# EAGLE board homeboard29 (EAGLE 6.0), part 1 of 2
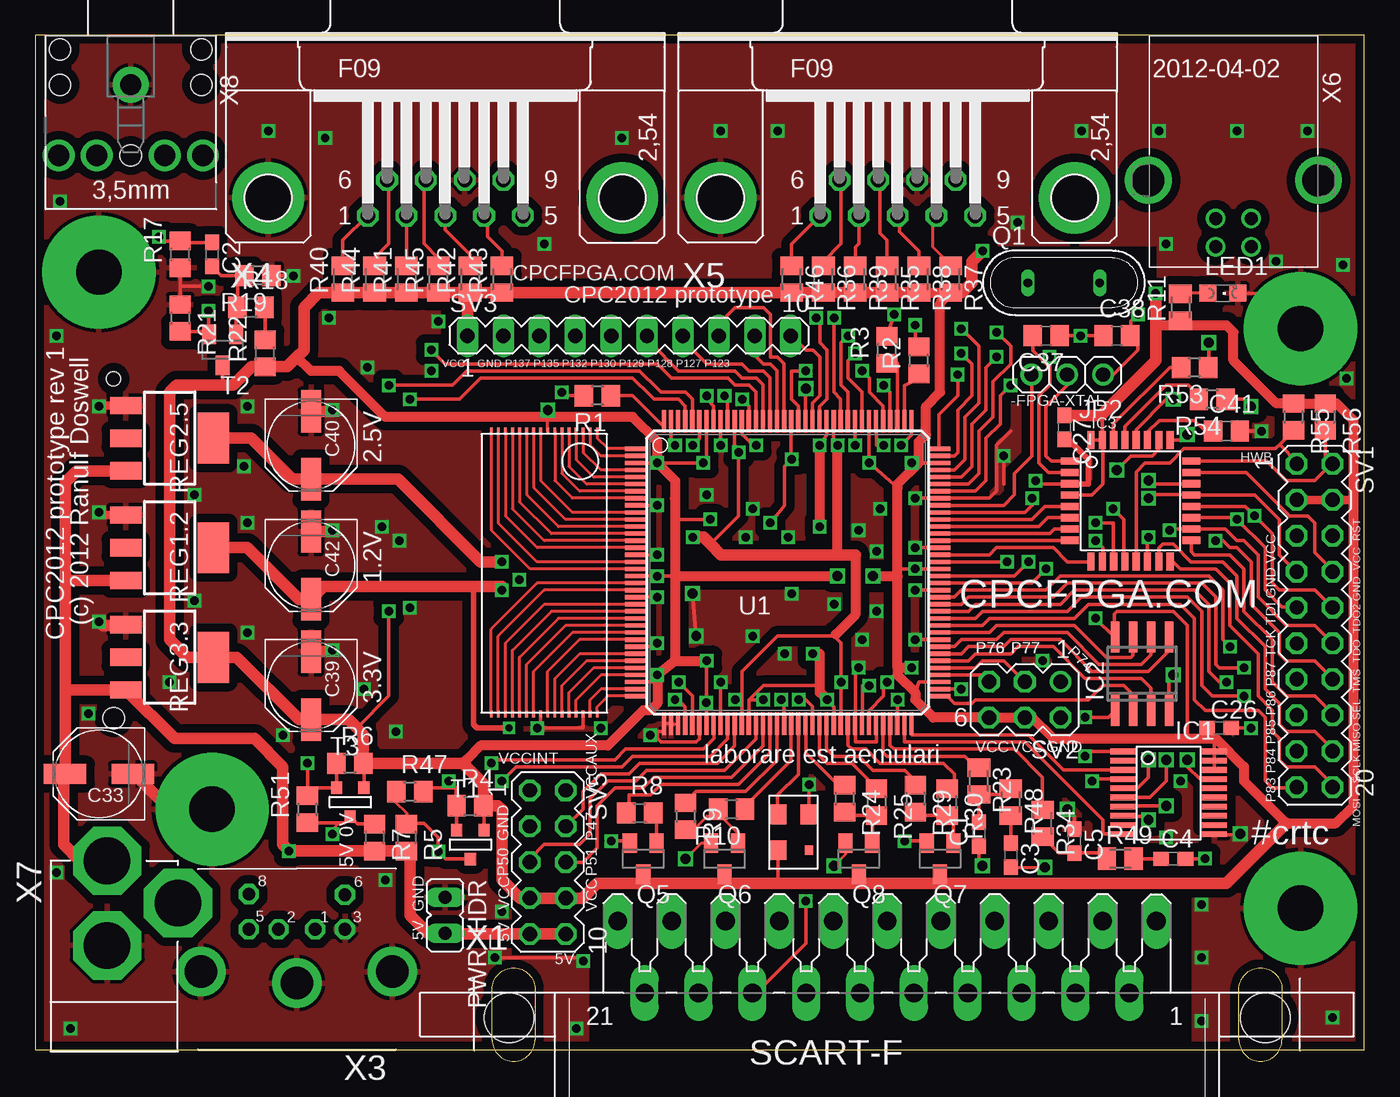
[diagram p0: board, top side]
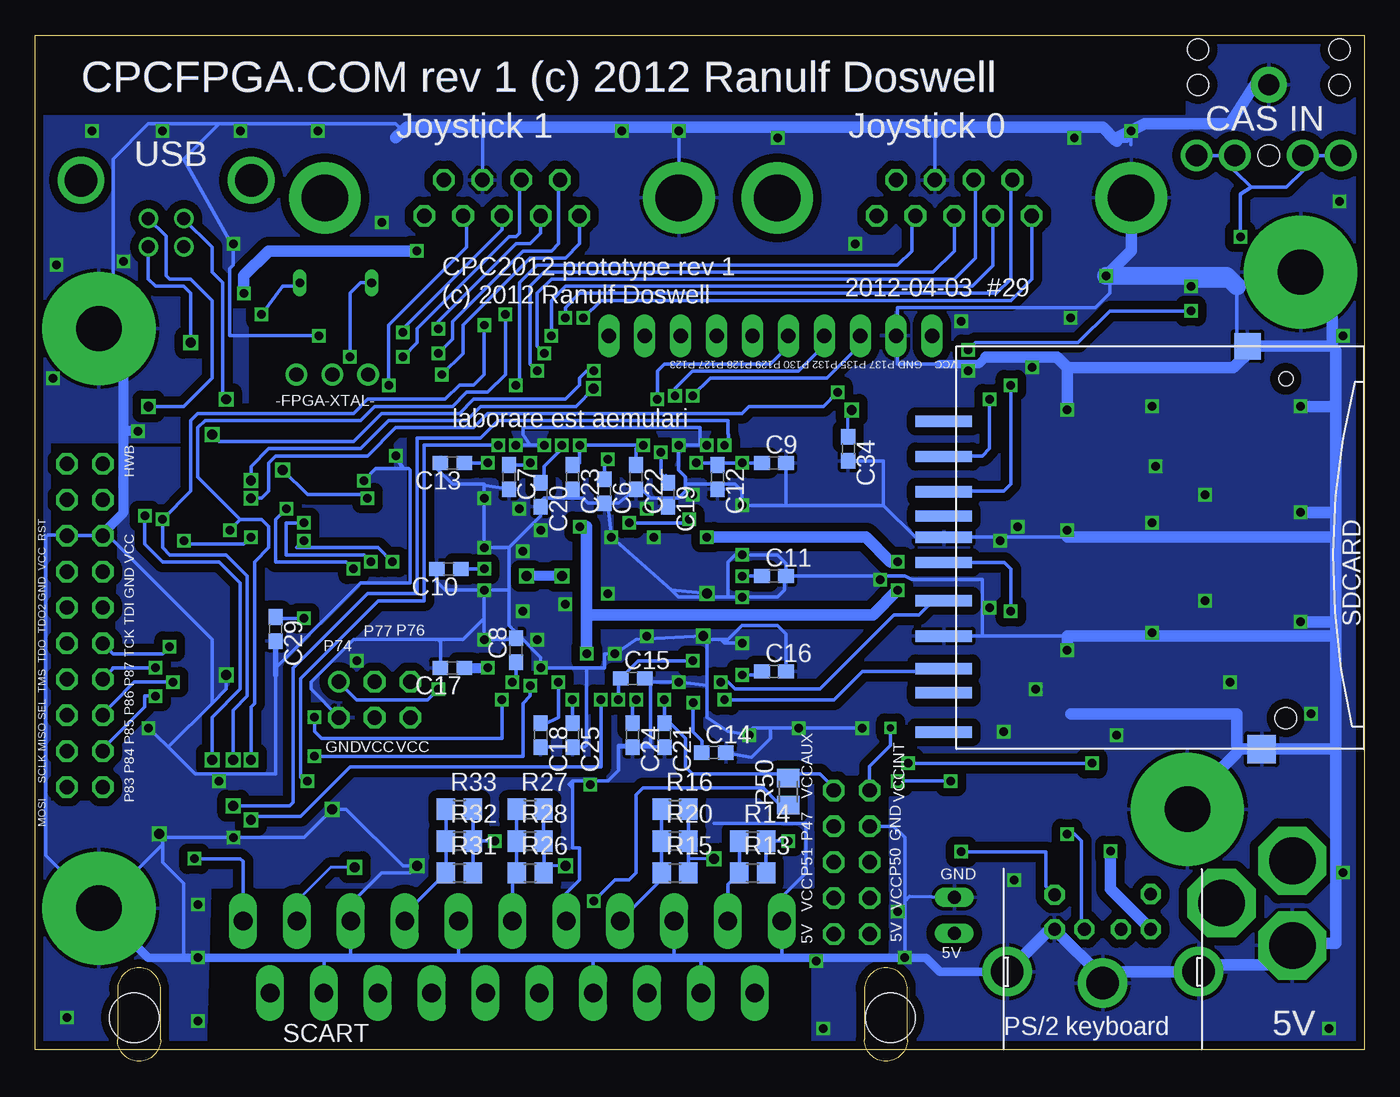
[diagram p1: board, bottom side, seen from below]

Size 94 x 72.58 mm. Coordinates in mm from the lower left corner, seen from the top.
Outline: 0,0.83 94,0.83 94,72.58 0,72.58 0,0.83
Copper layers (1*16): Top 0.0356mm / dielectric 1.5011mm / Bottom 0.0356mm
Design rules: minimum track width 7mil, minimum drill 15mil, track to track 7mil, track to pad 7mil, pad to pad 7mil, via to via 7mil, smd to smd 7mil, copper to edge 15mil, drill to drill 15mil, minimum pad ring 7mil, minimum via ring 7mil, stop-mask expansion 4mil, vias tented up to drill 0mil, thermal gap 10mil
Net classes: 1 power: width 0.6 mm, drill 1.1 mm, clearance 0.4 mm; 2 gnd: width 0.305 mm, drill 0.508 mm, clearance 0.152 mm

## Footprints (pad centres in the part's own frame; a part is rotated, then mirrored left to right if it is on the bottom)
C0603 = smd 1.1 x 1: 1 -0.85,0; 2 0.85,0
PANASONIC_D = smd 3 x 1.4: + 2.4,0; - -2.4,0
C0805 = smd 1.3 x 1.5: 1 -0.95,0; 2 0.95,0
VO20 = smd 0.4 x 1.8: 1 5.85,6.15; 2 5.2,6.15; 3 4.55,6.15; 4 3.9,6.15; 5 3.25,6.15; 6 2.6,6.15; 7 1.95,6.15; 8 1.3,6.15; 9 0.65,6.15; 10 0,6.15; 11 0,-0.3; 12 0.65,-0.3; 13 1.3,-0.3; 14 1.95,-0.3; 15 2.6,-0.3; 16 3.25,-0.3; 17 3.9,-0.3; 18 4.55,-0.3; 19 5.2,-0.3; 20 5.85,-0.3
SO-08 = smd 0.6 x 2.2: 1 -1.905,-2.6; 2 -0.635,-2.6; 3 0.635,-2.6; 4 1.905,-2.6; 5 1.905,2.6; 6 0.635,2.6; 7 -0.635,2.6; 8 -1.905,2.6
TQFP32-08 = smd 1.27 x 0.508: 1 -4.293,2.8; 2 -4.293,2; 3 -4.293,1.2; 4 -4.293,0.4; 5 -4.293,-0.4; 6 -4.293,-1.2; 7 -4.293,-2; 8 -4.293,-2.8; 17 4.293,-2.8; 18 4.293,-2; 19 4.293,-1.2; 20 4.293,-0.4; 21 4.293,0.4; 22 4.293,1.2; 23 4.293,2; 24 4.293,2.8 | smd 0.508 x 1.27: 9 -2.8,-4.293; 10 -2,-4.293; 11 -1.2,-4.293; 12 -0.4,-4.293; 13 0.4,-4.293; 14 1.2,-4.293; 15 2,-4.293; 16 2.8,-4.293; 25 2.8,4.293; 26 2,4.293; 27 1.2,4.293; 28 0.4,4.293; 29 -0.4,4.293; 30 -1.2,4.293; 31 -2,4.293; 32 -2.8,4.293
1X03 = drill 1.016: 1 -2.54,0; 2 0,0; 3 2.54,0
CHIPLED_0805 = smd 1.2 x 1.2: A 0,-1.05; C 0,1.05
JP1 = drill 0.914 long: 1 0,-1.27; 2 0,1.27
QS = drill 0.61 long: 1 -2.54,0; 2 2.54,0
SOT23 = smd 1 x 1.4: 1 -0.95,-1.1; 2 0.95,-1.1; 3 0,1.1
R0805 = smd 1.3 x 1.5: 1 -0.95,0; 2 0.95,0
M0805 = smd 1.3 x 1.6: 1 -0.95,0; 2 0.95,0
SOT223 = smd 1.219 x 2.235: 1 -2.311,-3.099; 2 0,-3.099; 3 2.311,-3.099 | smd 3.6 x 2.2: 4 0,3.099
MA10-2 = drill 1.016 octagon: 1 -11.43,-1.27; 2 -11.43,1.27; 3 -8.89,-1.27; 4 -8.89,1.27; 5 -6.35,-1.27; 6 -6.35,1.27; 7 -3.81,-1.27; 8 -3.81,1.27; 9 -1.27,-1.27; 10 -1.27,1.27; 11 1.27,-1.27; 12 1.27,1.27; 13 3.81,-1.27; 14 3.81,1.27; 15 6.35,-1.27; 16 6.35,1.27; 17 8.89,-1.27; 18 8.89,1.27; 19 11.43,-1.27; 20 11.43,1.27
MA03-2 = drill 1.016: 1 -2.54,-1.27 | drill 1.016 octagon: 2 -2.54,1.27; 3 0,-1.27; 4 0,1.27; 5 2.54,-1.27; 6 2.54,1.27
MA10-1 = drill 1.016 long: 1 -11.43,0; 2 -8.89,0; 3 -6.35,0; 4 -3.81,0; 5 -1.27,0; 6 1.27,0; 7 3.81,0; 8 6.35,0; 9 8.89,0; 10 11.43,0
MA05-2 = drill 1.016 octagon: 1 -5.08,-1.27; 2 -5.08,1.27; 3 -2.54,-1.27; 4 -2.54,1.27; 5 0,-1.27; 6 0,1.27; 7 2.54,-1.27; 8 2.54,1.27; 9 5.08,-1.27; 10 5.08,1.27
SOT-23 = smd 0.787 x 0.889: 1 0.025,-1.016; 2 -0.94,1.016; 3 0.991,1.016
TQ144 = smd 1.6 x 0.3: P1 -10.7,8.75; P2 -10.7,8.25; P3 -10.7,7.75; P4 -10.7,7.25; P5 -10.7,6.75; P6 -10.7,6.25; P7 -10.7,5.75; P8 -10.7,5.25; P9 -10.7,4.75; P10 -10.7,4.25; P11 -10.7,3.75; P12 -10.7,3.25; P13 -10.7,2.75; P14 -10.7,2.25; P15 -10.7,1.75; P16 -10.7,1.25; P17 -10.7,0.75; P18 -10.7,0.25; P19 -10.7,-0.25; P20 -10.7,-0.75; P21 -10.7,-1.25; P22 -10.7,-1.75; P23 -10.7,-2.25; P24 -10.7,-2.75; P25 -10.7,-3.25; P26 -10.7,-3.75; P27 -10.7,-4.25; P28 -10.7,-4.75; P29 -10.7,-5.25; P30 -10.7,-5.75; P31 -10.7,-6.25; P32 -10.7,-6.75; P33 -10.7,-7.25; P34 -10.7,-7.75; P35 -10.7,-8.25; P36 -10.7,-8.75; P73 10.7,-8.75; P74 10.7,-8.25; P75 10.7,-7.75; P76 10.7,-7.25; P77 10.7,-6.75; P78 10.7,-6.25; P79 10.7,-5.75; P80 10.7,-5.25; P81 10.7,-4.75; P82 10.7,-4.25; P83 10.7,-3.75; P84 10.7,-3.25; P85 10.7,-2.75; P86 10.7,-2.25; P87 10.7,-1.75; P88 10.7,-1.25; P89 10.7,-0.75; P90 10.7,-0.25; P91 10.7,0.25; P92 10.7,0.75; P93 10.7,1.25; P94 10.7,1.75; P95 10.7,2.25; P96 10.7,2.75; P97 10.7,3.25; P98 10.7,3.75; P99 10.7,4.25; P100 10.7,4.75; P101 10.7,5.25; P102 10.7,5.75; P103 10.7,6.25; P104 10.7,6.75; P105 10.7,7.25; P106 10.7,7.75; P107 10.7,8.25; P108 10.7,8.75 | smd 0.3 x 1.6: P37 -8.75,-10.7; P38 -8.25,-10.7; P39 -7.75,-10.7; P40 -7.25,-10.7; P41 -6.75,-10.7; P42 -6.25,-10.7; P43 -5.75,-10.7; P44 -5.25,-10.7; P45 -4.75,-10.7; P46 -4.25,-10.7; P47 -3.75,-10.7; P48 -3.25,-10.7; P49 -2.75,-10.7; P50 -2.25,-10.7; P51 -1.75,-10.7; P52 -1.25,-10.7; P53 -0.75,-10.7; P54 -0.25,-10.7; P55 0.25,-10.7; P56 0.75,-10.7; P57 1.25,-10.7; P58 1.75,-10.7; P59 2.25,-10.7; P60 2.75,-10.7; P61 3.25,-10.7; P62 3.75,-10.7; P63 4.25,-10.7; P64 4.75,-10.7; P65 5.25,-10.7; P66 5.75,-10.7; P67 6.25,-10.7; P68 6.75,-10.7; P69 7.25,-10.7; P70 7.75,-10.7; P71 8.25,-10.7; P72 8.75,-10.7; P109 8.75,10.7; P110 8.25,10.7; P111 7.75,10.7; P112 7.25,10.7; P113 6.75,10.7; P114 6.25,10.7; P115 5.75,10.7; P116 5.25,10.7; P117 4.75,10.7; P118 4.25,10.7; P119 3.75,10.7; P120 3.25,10.7; P121 2.75,10.7; P122 2.25,10.7; P123 1.75,10.7; P124 1.25,10.7; P125 0.75,10.7; P126 0.25,10.7; P127 -0.25,10.7; P128 -0.75,10.7; P129 -1.25,10.7; P130 -1.75,10.7; P131 -2.25,10.7; P132 -2.75,10.7; P133 -3.25,10.7; P134 -3.75,10.7; P135 -4.25,10.7; P136 -4.75,10.7; P137 -5.25,10.7; P138 -5.75,10.7; P139 -6.25,10.7; P140 -6.75,10.7; P141 -7.25,10.7; P142 -7.75,10.7; P143 -8.25,10.7; P144 -8.75,10.7
GNDHOLE = drill 3.2 pad 8: GND 0,0
OSC_7C = smd 0.7 x 0.6: ENA -1.27,-1.1 | smd 1.4 x 1.2: GND 1.27,-1.1; OUT 1.27,1.1; VDD -1.27,1.1
SDCARD-NOHOLE = smd 0.8 x 4 bottom: 1 7.8,0.99; 2 10.3,0.99; 3 13.5,0.99; 4 15.3,0.99; 5 18,0.99; 6 20.5,0.99; 7 22.8,0.99; 8 24.5,0.99; 9 5.3,0.99; CD 12,0.99; WP 27.3,0.99 | smd 2.032 x 2.032 bottom: MT1 28.5,-21.5 | smd 1.9 x 1.9 bottom: MT3 0,-20.5 | hole 1.5: 26.3,-23.21 | hole 1: 2.3,-23.21
TSOP32 = smd 0.5 x 0.2: P1 -9.75,3.75; P2 -9.75,3.25; P3 -9.75,2.75; P4 -9.75,2.25; P5 -9.75,1.75; P6 -9.75,1.25; P7 -9.75,0.75; P8 -9.75,0.25; P9 -9.75,-0.25; P10 -9.75,-0.75; P11 -9.75,-1.25; P12 -9.75,-1.75; P13 -9.75,-2.25; P14 -9.75,-2.75; P15 -9.75,-3.25; P16 -9.75,-3.75; P17 10.25,-3.75; P18 10.25,-3.25; P19 10.25,-2.75; P20 10.25,-2.25; P21 10.25,-1.75; P22 10.25,-1.25; P23 10.25,-0.75; P24 10.25,-0.25; P25 10.25,0.25; P26 10.25,0.75; P27 10.25,1.25; P28 10.25,1.75; P29 10.25,2.25; P30 10.25,2.75; P31 10.25,3.25; P32 10.25,3.75
SCART-CLIP = drill 1.321 long: 1 19.05,5.08; 2 17.145,0; 3 15.24,5.08; 4 13.335,0; 5 11.43,5.08; 6 9.525,0; 7 7.62,5.08; 8 5.715,0; 9 3.81,5.08; 10 1.905,0; 11 0,5.08; 12 -1.905,0; 13 -3.81,5.08; 14 -5.715,0; 15 -7.62,5.08; 16 -9.525,0; 17 -11.43,5.08; 18 -13.335,0; 19 -15.24,5.08; 20 -17.145,0; 21 -19.05,5.08 | hole 3.5: 26.75,-1.75; -26.75,-1.75
M_DIN6 = drill 0.9 pad 1.422 octagon: 1 -1.3,-3.75; 2 1.3,-3.75; 3 -3.4,-3.75; 5 3.4,-3.75; 6 -3.4,-6.2; 8 3.4,-6.25 | drill 2.3 pad 3.5: SH1 6.8,-0.75; SH2 0,0.05; SH3 -6.75,-0.75
F09HP = drill 1.016 octagon: 1 -5.486,-1.27; 2 -2.743,-1.27; 3 0,-1.27; 4 2.743,-1.27; 5 5.486,-1.27; 6 -4.115,1.27; 7 -1.372,1.27; 8 1.372,1.27; 9 4.115,1.27 | drill 3.302 pad 5.08: G1 -12.522,0; G2 12.522,0
85-32004-10X = drill 0.92 pad 1.27: 1 4.71,-1.25; 2 4.71,1.25; 3 2.71,1.25; 4 2.71,-1.25 | drill 2.3 pad 3: M1 0,6.02; M2 0,-6.02
DC-21MM = drill 3.302 pad 4.826 octagon: 1 -5.08,-3.353; 2 -0.076,-6.35; 3 -0.076,-0.356
20-0137 = drill 1.5 pad 2.54: 1 -5,0 | drill 1.5: 2 0,5.1; 3 0,2.4; 4 0,-2.4; 5 0,-5.1 | hole 1.5: -5,5; -5,-5; 0,0; -7.5,5; -7.5,-5

## Placement (x,y rotation side)
C1  [C0603]  66.75,16.08 90 top
C2  100nF  [C0603]  12.5,57.08 270 top
C3  [C0603]  69,14.58 270 top
C4  [C0603]  80.5,14.33 0 top
C5  [C0603]  73.5,15.58 270 top
C6  100nF  [C0603]  53.75,40.33 270 bottom
C7  100nF  [C0603]  60.5,41.33 270 bottom
C8  100nF  [C0603]  60,29.08 90 bottom
C9  100nF  [C0603]  41.75,42.33 0 bottom
C10  100nF  [C0603]  64.75,34.83 180 bottom
C11  100nF  [C0603]  41.75,34.33 0 bottom
C12  100nF  [C0603]  45.75,41.33 270 bottom
C13  100nF  [C0603]  64.5,42.33 180 bottom
C14  100nF  [C0603]  46,21.83 0 bottom
C15  100nF  [C0603]  51.75,27.08 0 bottom
C16  100nF  [C0603]  41.75,27.58 0 bottom
C17  100nF  [C0603]  64.5,27.83 180 bottom
C18  100nF  [C0603]  58.25,23.08 270 bottom
C19  100nF  [C0603]  49.25,40.08 270 bottom
C20  100nF  [C0603]  58.25,40.08 270 bottom
C21  100nF  [C0603]  49.5,23.08 270 bottom
C22  100nF  [C0603]  51.5,41.33 270 bottom
C23  100nF  [C0603]  56,41.33 270 bottom
C24  100nF  [C0603]  51.75,23.08 270 bottom
C25  100nF  [C0603]  56,23.08 270 bottom
C26  100nF  [C0603]  83.75,23.58 0 top
C27  100nF  [C0603]  72.8,44.84 270 top
C29  100nF  [C0603]  77,30.58 270 bottom
C33  100u  [PANASONIC_D]  4.5,20.33 180 top
C34  100nF  [C0603]  36.5,43.33 270 bottom
C37  [C0805]  71.5,51.33 180 top
C38  [C0805]  76.5,51.33 0 top
C39  100u  [PANASONIC_D]  19.5,26.58 270 top
C40  100u  [PANASONIC_D]  19.5,43.58 270 top
C41  1uF  [C0805]  84.25,44.58 0 top
C42  100u  [PANASONIC_D]  19.5,35.08 270 top
IC1  XCF02S  [VO20]  83.09,16.06 90 top
IC2  25LC080SN  [SO-08]  78.28,27.41 0 top
IC3  ATMEGA32U2-TQFP  [TQFP32-08]  77.47,39.65 0 top
JP2  [1X03]  73,48.58 180 top
LED1  [CHIPLED_0805]  84,54.33 270 top
PWR_HDR  [JP1]  29,10.33 180 top
Q1  [QS]  72.75,55.08 0 top
Q5  BC848SMD  [SOT23]  43,14.33 180 top
Q6  BC848SMD  [SOT23]  48.75,14.33 180 top
Q7  BC848SMD  [SOT23]  64,14.33 180 top
Q8  BC848SMD  [SOT23]  58.25,14.33 180 top
R1  100  [R0805]  39.76,47.07 180 top
R2  100  [R0805]  62.5,49.58 90 top
R3  100  [R0805]  60.25,50.33 90 top
R4  1000  [R0805]  30.75,18.08 0 top
R5  1000  [R0805]  26.25,15.83 270 top
R6  1000  [R0805]  22.25,21.08 0 top
R7  1000  [R0805]  24,15.83 270 top
R8  2200  [R0805]  42.75,17.58 0 top
R9  2200  [R0805]  46,17.33 270 top
R10  1000  [R0805]  49.25,17.83 180 top
R11  [M0805]  81,53.33 90 top
R13  680  [R0805]  43.25,13.33 0 bottom
R14  2200  [R0805]  43.25,15.58 0 bottom
R15  270  [R0805]  48.75,13.33 0 bottom
R16  680  [R0805]  48.75,17.83 0 bottom
R17  10000  [R0805]  10.25,57.08 90 top
R18  4700  [R0805]  15.25,53.33 0 top
R19  10000  [R0805]  15.75,55.58 180 top
R20  4700  [R0805]  48.75,15.58 0 bottom
R21  47000  [R0805]  10.25,52.58 270 top
R22  1000  [R0805]  16.25,50.08 90 top
R23  [M0805]  66.75,19.83 270 top
R24  2200  [R0805]  57.25,18.58 270 top
R25  1000  [R0805]  59.5,18.33 270 top
R26  270  [R0805]  59,13.33 0 bottom
R27  680  [R0805]  59,17.83 0 bottom
R28  4700  [R0805]  59,15.58 0 bottom
R29  2200  [R0805]  62.25,18.58 270 top
R30  1000  [R0805]  64.5,18.33 270 top
R31  270  [R0805]  64,13.33 0 bottom
R32  680  [R0805]  64,15.58 0 bottom
R33  4700  [R0805]  64,17.83 0 bottom
R34  [M0805]  71.25,16.83 270 top
R35  [M0805]  60.25,55.33 270 top
R36  [M0805]  55.75,55.33 270 top
R37  [M0805]  64.75,55.33 270 top
R38  [M0805]  62.5,55.33 270 top
R39  [M0805]  58,55.33 270 top
R40  [M0805]  21.75,55.33 90 top
R41  [M0805]  26.25,55.33 90 top
R42  [M0805]  30.75,55.33 90 top
R43  [M0805]  33,55.33 90 top
R44  [M0805]  24,55.33 90 top
R45  [M0805]  28.5,55.33 90 top
R46  [M0805]  53.5,55.33 270 top
R47  270  [R0805]  26.5,19.08 0 top
R48  [M0805]  69,18.33 270 top
R49  [M0805]  76.75,14.33 0 top
R50  2k2  [M0805]  40.75,19.08 90 bottom
R51  270  [R0805]  19.25,17.83 90 top
R53  22  [R0805]  82,49.08 180 top
R54  22  [R0805]  83.25,46.83 180 top
R55  4700  [R0805]  89,45.58 270 top
R56  4700  [R0805]  91.25,45.58 270 top
REG1.2  1.2V  [SOT223]  9.5,36.33 270 top
REG2.5  2.5V  [SOT223]  9.5,44.08 270 top
REG3.3  3.3V  [SOT223]  9.5,28.58 270 top
SV1  [MA10-2]  90.5,30.83 270 top
SV2  [MA03-2]  70,25.58 180 top
SV3  [MA10-1]  42,51.33 0 top
SV5  [MA05-2]  36.25,14.08 270 top
T1  BSS138  [SOT-23]  30.75,15.33 0 top
T2  BC848  [SOT23]  13.25,50.33 180 top
T3  BSS138  [SOT-23]  22.25,18.33 0 top
U1  XC3S400TQ144  [TQ144]  53.22,34.58 0 top
U$1  GNDHOLE  [GNDHOLE]  12.5,17.83 0 top
U$2  TXO_7C  [OSC_7C]  53.62,16.2 90 top
U$3  SDMMCNOHOLE  [SDCARD-NOHOLE]  28.75,50.58 270 top
U$6  AS6C4008  [TSOP32]  36,34.83 270 top
U$7  GNDHOLE  [GNDHOLE]  4.5,55.83 0 top
U$8  GNDHOLE  [GNDHOLE]  89.5,51.83 0 top
U$9  GNDHOLE  [GNDHOLE]  89.5,10.83 0 top
X1  SCART-CLIP  [SCART-CLIP]  60.25,4.83 0 top
X3  [M_DIN6]  18.5,5.58 180 top
X4  [F09HP]  29,61.08 0 top
X5  [F09HP]  61,61.08 0 top
X6  MINI-USB_4P-85-32004-10X  [85-32004-10X]  84.75,62.33 270 top
X7  DC21MMX  [DC-21MM]  5,7.83 180 top
X8  STEREOJACK  [20-0137]  6.75,64.08 270 top

## Library data of the parts
C1-C5 R11 R23 R34-R46 R48-R50 = resistor
C6-C27 C29 C33 C34 C37-C42 R1-R10 R13-R22 R24-R33 R47 R51 R53-R56 = rcl
IC1 = smd-special
IC2 = microchip; MF: MICROCHIP; MPN: 25LC080/SN; OC_FARNELL: 1137302; OC_NEWARK: 96K4092
IC3 JP2 LED1 = adafruit
PWR_HDR = jumper
Q1 = special
Q5-Q8 = bc548
REG1.2 REG2.5 REG3.3 U$1-U$3 U$6-U$9 X8 = cpcfpga
SV1-SV3 SV5 = con-lstb; OC_FARNELL: unknown; OC_NEWARK: unknown
T1 T3 = zetex; OC_FARNELL: unknown; OC_NEWARK: unknown
T2 = transistor
U1 = xilinx_spartan3_virtex4_and_5
X1 = cpcfpga; OC_FARNELL: unknown; OC_NEWARK: unknown
X3 = mini_din
X4 X5 = con-subd; OC_FARNELL: unknown; OC_NEWARK: unknown
X6 = con-cypressindustries; OC_FARNELL: unknown; OC_NEWARK: unknown
X7 = powersupply

## Nets
1: X7.1
AINLEFT: X1.6
AINRIGHT: X1.2
AT_CLKO: IC3.22 U1.P124
AT_RESET: IC3.24 R56.2 SV1.2
B0: R30.1 U1.P63
B1: R29.1 U1.P60
CASIN: R21.2 T2.2 U1.P131
CLK16: U1.P56 U$2.OUT
CLK_5V: R5.1 R47.1 T1.1 X3.6
COMPIN: X1.20
CSYNC: R8.1 U1.P52
DATA_5V: R7.1 R51.1 T3.1 X3.1
EMER_BOOT: IC3.13 R55.2 SV1.1
EXP_A: SV5.4 U1.P47
EXP_B: SV5.5 U1.P50
EXP_C: SV5.6 U1.P51
EXTCLK: JP2.3 U1.P100
FL_DI: IC2.5 U1.P79
FL_DO: IC2.2 U1.P73
FL_HOLD: IC2.7 U1.P82
FL_SCLK: IC2.6 U1.P80
FL_SEL: IC2.1 U1.P70
FL_WP: IC2.3 U1.P78
FPGA_AUDIO_LEFT: R23.1 U1.P68
FPGA_AUDIO_RIGHT: R34.1 U1.P69
G0: R25.1 U1.P59
G1: R24.1 U1.P57
GND: C1.1 C5.1 C6.2 C7.2 C8.2 C9.2 C10.2 C11.2 C12.2 C13.2 C14.2 C15.2 C16.2 C17.2 C18.2 C19.2 C20.2 C21.2 C22.2 C23.2 C24.2 C25.2 C26.2 C27.2 C29.2 C33.- C34.2 C37.1 C38.1 C39.- C40.- C41.2 C42.- IC1.11 IC2.4 IC3.3 LED1.C PWR_HDR.1 R17.1 R19.1 R21.1 REG1.2.1 REG2.5.1 REG3.3.1 SV1.5 SV1.6 SV2.2 SV3.2 SV5.3 U1.P9 U1.P16 U1.P22 U1.P29 U1.P37 U1.P38 U1.P39 U1.P42 U1.P45 U1.P64 U1.P67 U1.P81 U1.P88 U1.P94 U1.P101 U1.P114 U1.P117 U1.P136 U1.P139 U$1.GND U$2.GND U$3.3 U$3.6 U$3.MT1 U$3.MT3 U$6.P24 U$6.P30 U$7.GND U$8.GND U$9.GND X1.4 X1.5 X1.9 X1.13 X1.14 X1.17 X1.18 X1.21 X3.3 X3.SH1 X3.SH2 X3.SH3 X4.8 X4.G1 X5.8 X5.G1 X7.3 X8.1
HDR_MISO: SV1.15 U1.P85
HDR_MOSI: SV1.19 U1.P83
HDR_SCLK: SV1.17 U1.P84
HDR_SEL: SV1.13 U1.P86
HDR_SPARE: SV1.11 U1.P87
JOY0_DOWN: R41.2 U1.P118 X4.2
JOY0_FIRE1: R45.2 U1.P116 X4.7
JOY0_FIRE2: R44.2 U1.P119 X4.6
JOY0_LEFT: R42.2 U1.P113 X4.3
JOY0_RIGHT: R43.2 U1.P112 X4.4
JOY0_UP: R40.2 U1.P122 X4.1
JOY1_DOWN: R39.1 U1.P105 X5.2
JOY1_FIRE1: R35.1 U1.P104 X5.7
JOY1_FIRE2: R36.1 U1.P107 X5.6
JOY1_LEFT: R38.1 U1.P103 X5.3
JOY1_RIGHT: R37.1 U1.P102 X5.4
JOY1_UP: R46.1 U1.P108 X5.1
N$1: SV3.4 U1.P135
N$2: SV3.5 U1.P132
N$3: SV3.3 U1.P137
N$4: SV3.6 U1.P130
N$5: SV3.7 U1.P129
N$6: SV3.9 U1.P128
N$7: SV3.8 U1.P127
N$8: IC3.1 JP2.2
N$9: C41.1 IC3.27
N$10: LED1.A R11.2
N$12: C37.2 IC3.2 Q1.1
N$14: C38.2 JP2.1 Q1.2
N$16: SV3.10 U1.P123
N$35: IC1.3 U1.P72
N$36: R53.1 X6.2
N$38: IC1.10 U1.P71
N$39: R2.1 U1.P110
N$40: IC1.7 U1.P143
N$42: R1.1 U1.P144
N$43: R3.1 U1.P111
N$49: IC3.29 R54.2
N$50: REG2.5.2
N$51: C1.2 R23.2 R48.1
N$52: C3.1 R48.2
N$53: Q6.1 R9.2 R10.2
N$54: Q6.2 R15.2 R16.2 R20.2
N$55: Q8.1 R24.2 R25.2
N$56: Q8.2 R26.2 R27.2 R28.2
N$57: Q7.1 R29.2 R30.2
N$58: Q7.2 R31.2 R32.2 R33.2
N$59: Q5.2 R13.2 R14.2
N$60: C2.2 R18.1 R19.2 T2.1
N$61: C2.1 R17.2 X8.2 X8.3 X8.4 X8.5
N$62: R18.2 R22.2
N$63: Q5.1 R8.2
N$64: C4.1 R49.2
N$65: C5.2 R34.2 R49.1
N$66: R54.1 X6.3
N$67: U1.P1 U$6.P1
N$68: IC3.30 R53.2
N$69: IC3.28 X6.4
N$70: REG1.2.2
N$71: U1.P2 U$6.P2
N$72: U1.P4 U$6.P3
N$73: U1.P5 U$6.P4
N$74: U1.P6 U$6.P5
N$75: U1.P7 U$6.P6
N$76: U1.P8 U$6.P7
N$77: U1.P10 U$6.P9
N$78: U1.P11 U$6.P10
N$79: U1.P12 U$6.P11
N$80: U1.P13 U$6.P12
N$81: U1.P14 U$6.P13
N$82: U1.P15 U$6.P14
N$83: U1.P17 U$6.P15
N$84: U1.P18 U$6.P16
N$85: U1.P20 U$6.P17
N$86: U1.P21 U$6.P18
N$87: U1.P23 U$6.P19
N$88: U1.P24 U$6.P20
N$89: U1.P25 U$6.P21
N$90: U1.P26 U$6.P22
N$91: U1.P27 U$6.P23
N$92: U1.P28 U$6.P25
N$93: U1.P30 U$6.P26
N$94: U1.P31 U$6.P27
N$95: U1.P32 U$6.P28
N$96: U1.P33 U$6.P29
N$97: U1.P35 U$6.P31
N$98: U1.P36 U$6.P32
PC2: IC3.5 U1.P98
PC4: IC3.26 U1.P99
PC5: IC3.25 U1.P125
PD0: IC3.6 U1.P97
PD1: IC3.7 U1.P96
PD2: IC3.8 U1.P95
PD3: IC3.9 U1.P93
PD4: IC3.10 U1.P92
PD5: IC3.11 U1.P90
PD6: IC3.12 U1.P89
PROM_DO: IC1.1 U1.P65
PROM_INITB: IC1.8 U1.P58
PS2CLK: R4.1 R47.2 T1.2 U1.P46
PS2DAT: R6.1 R51.2 T3.2 U1.P44
R0: R10.1 U1.P55
R1: R9.1 U1.P53
SCART_BLANKING: R50.1 X1.16
SCART_BLUE: R31.1 R32.1 R33.1 X1.7
SCART_COMP: R13.1 R14.1 X1.19
SCART_GREEN: R26.1 R27.1 R28.1 X1.11
SCART_LEFT: C3.2 X1.3
SCART_MODE: X1.8
SCART_RED: R15.1 R16.1 R20.1 X1.15
SCART_RIGHT: C4.2 X1.1
SD_CLK: U1.P41 U$3.5
SD_CS: U1.P141 U$3.1
SD_DI: U1.P140 U$3.2
SD_DO: U1.P40 U$3.7
SPI_MISO: IC3.17 SV1.16
SPI_MOSI: IC3.16 SV1.20
SPI_SCLK: IC3.15 SV1.18
SPI_SEL: IC3.14 SV1.14
TCK: IC1.6 IC3.19 R2.2 SV1.9
TDI_FPGA: IC3.21 R1.2 SV1.7
TDO_EXP: IC3.23 SV1.8
TDO_FPGA: IC1.4 U1.P109
TDO_PROM: IC1.17 IC3.20 SV1.10
TMS: IC1.5 IC3.18 R3.2 SV1.12
VCC: C6.1 C7.1 C8.1 C9.1 C10.1 C11.1 C12.1 C13.1 C14.1 C15.1 C16.1 C17.1 C26.1 C27.1 C29.1 C34.1 C39.+ IC1.18 IC1.19 IC1.20 IC2.8 IC3.4 IC3.31 IC3.32 Q5.3 Q6.3 Q7.3 Q8.3 R4.2 R6.2 R11.1 R22.1 R35.2 R36.2 R37.2 R38.2 R39.2 R40.1 R41.1 R42.1 R43.1 R44.1 R45.1 R46.2 R55.1 R56.1 REG3.3.4 SV1.3 SV1.4 SV2.4 SV2.6 SV3.1 SV5.7 SV5.8 T1.3 T2.3 T3.3 U1.P3 U1.P19 U1.P34 U1.P43 U1.P54 U1.P66 U1.P75 U1.P91 U1.P106 U1.P115 U1.P126 U1.P138 U$2.VDD U$3.4 U$6.P8
VCC5: C33.+ PWR_HDR.2 R5.2 R7.2 REG1.2.3 REG2.5.3 REG3.3.3 SV5.9 SV5.10 X3.5 X7.2
VCCAUX: C18.1 C19.1 C20.1 C21.1 C40.+ R50.2 REG2.5.4 SV5.2 U1.P48 U1.P62 U1.P120 U1.P134
VCCINT: C22.1 C23.1 C24.1 C25.1 C42.+ REG1.2.4 SV5.1 U1.P49 U1.P61 U1.P121 U1.P133
X3: SV2.5 U1.P76
X4: SV2.3 U1.P77
X8: SV2.1 U1.P74